# Altium PCB RaspberryPi4_shield.PcbDoc
Units mm, origin at the board's own origin, x right, y up, seen from the top; angles counter-clockwise.
Board outline 56 x 65 mm, 2 copper layers (Top Layer, Bottom Layer), stack 1.57 mm thick; 19 components, 11 nets, 51 pads, 17 vias.
Unrouted connection lines stored in the file: 11.
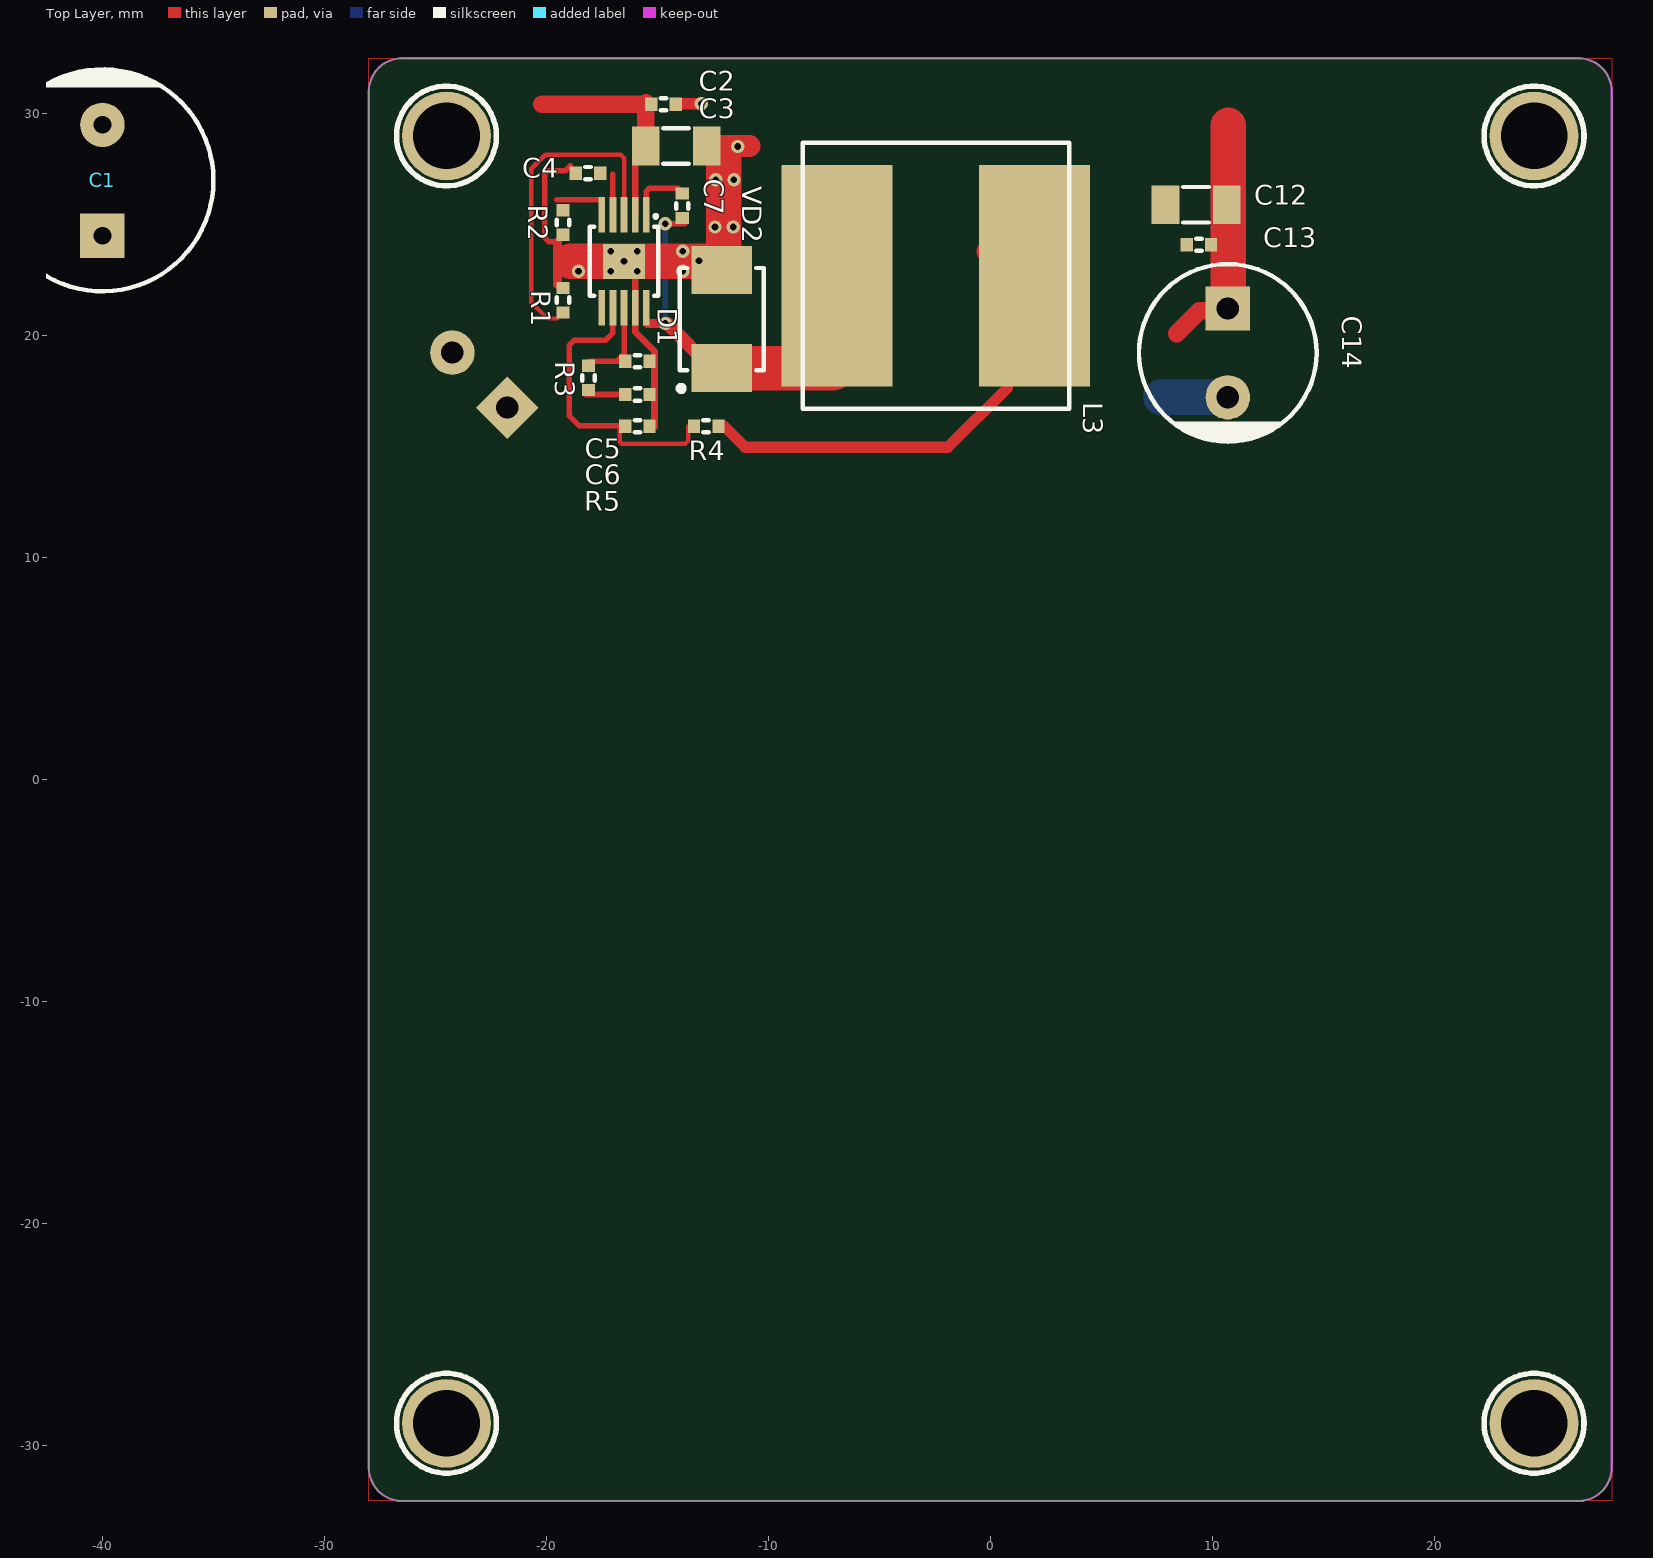
[diagram p0: Top Layer view]
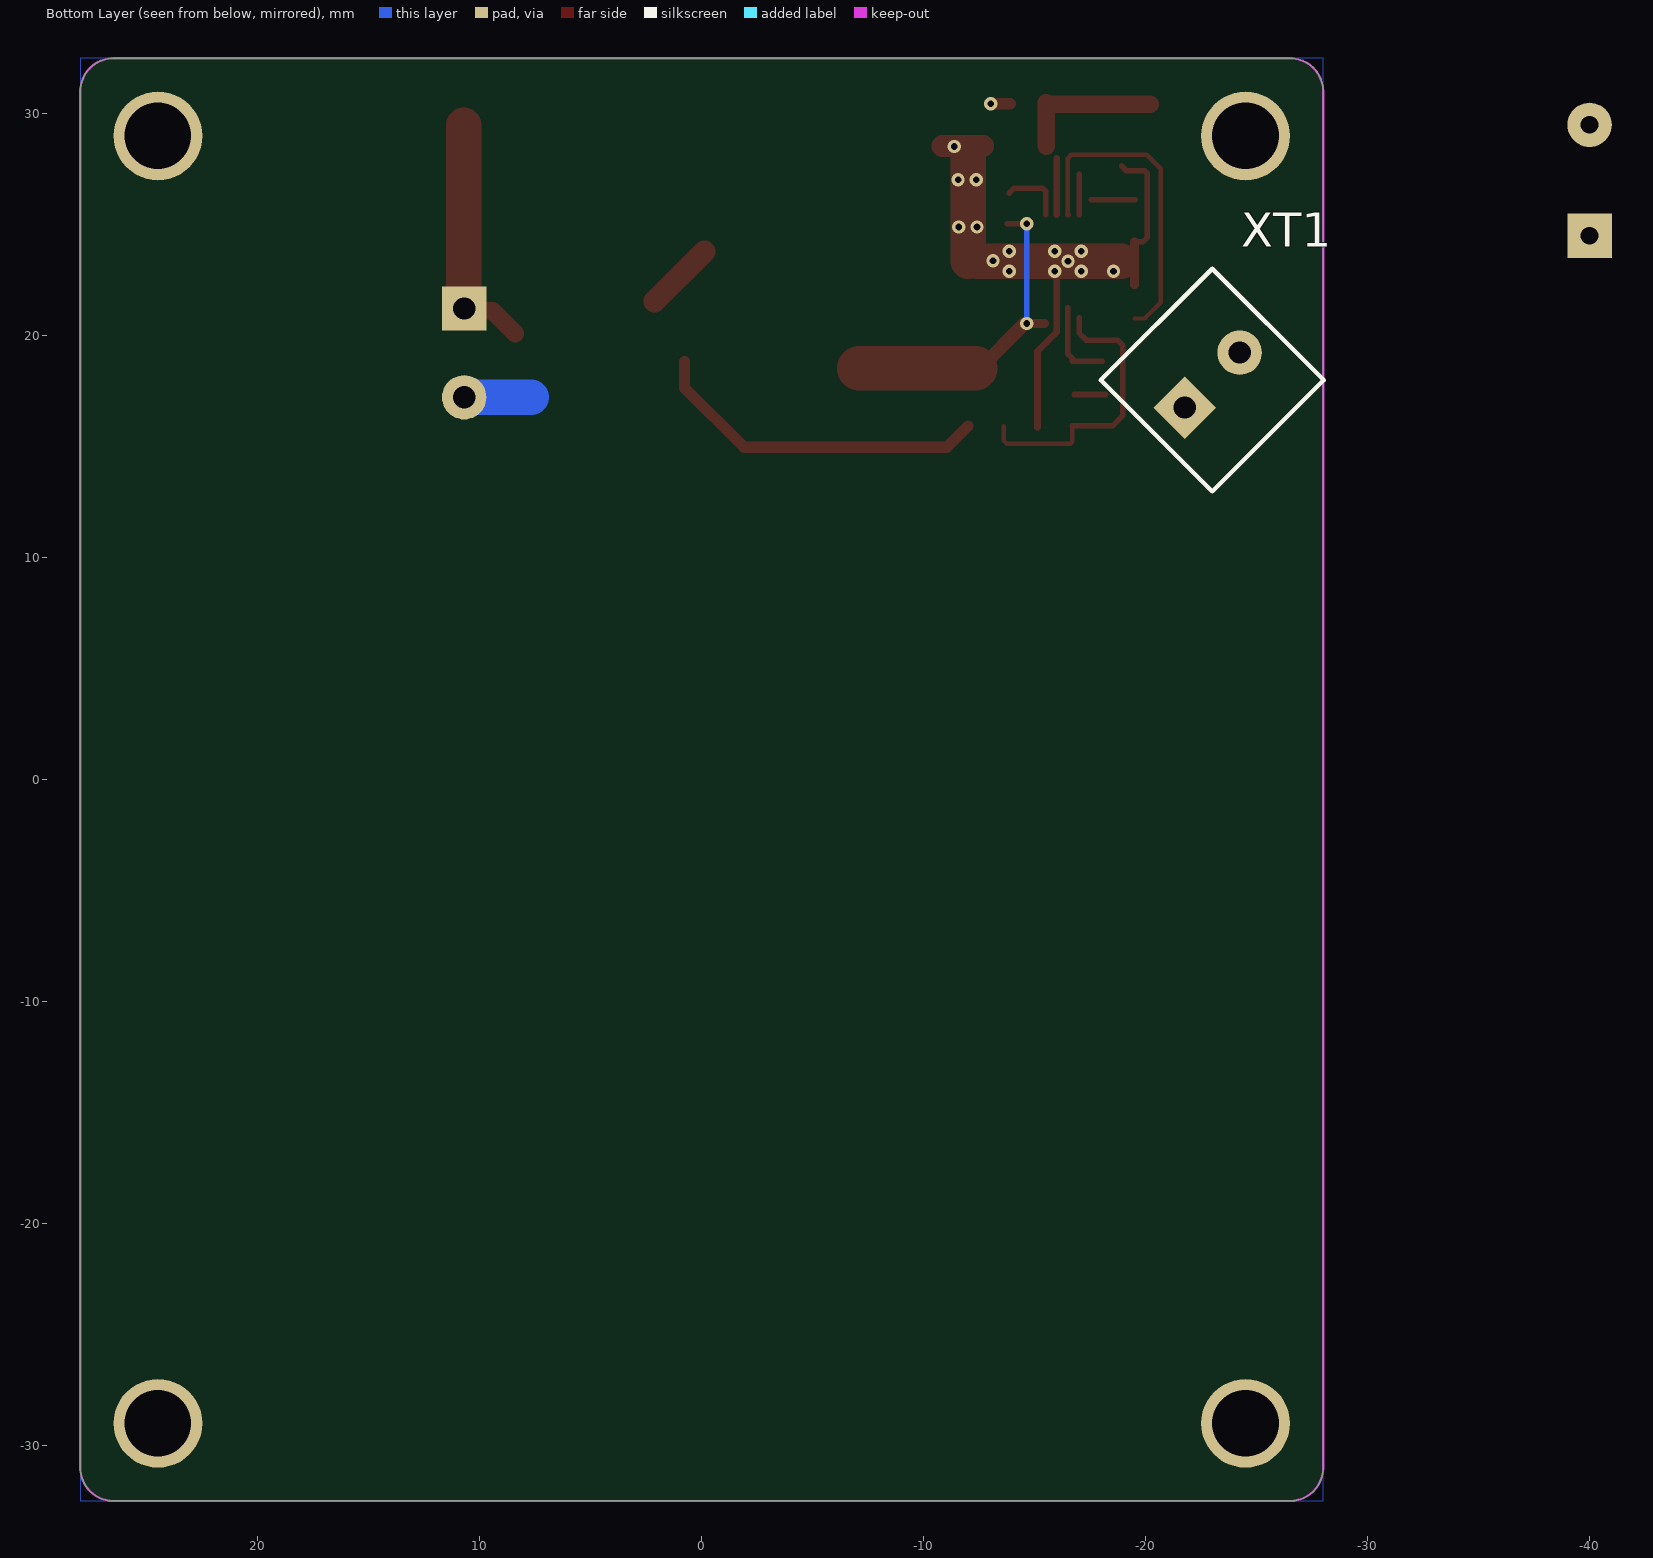
[diagram p1: Bottom Layer view, seen from below]
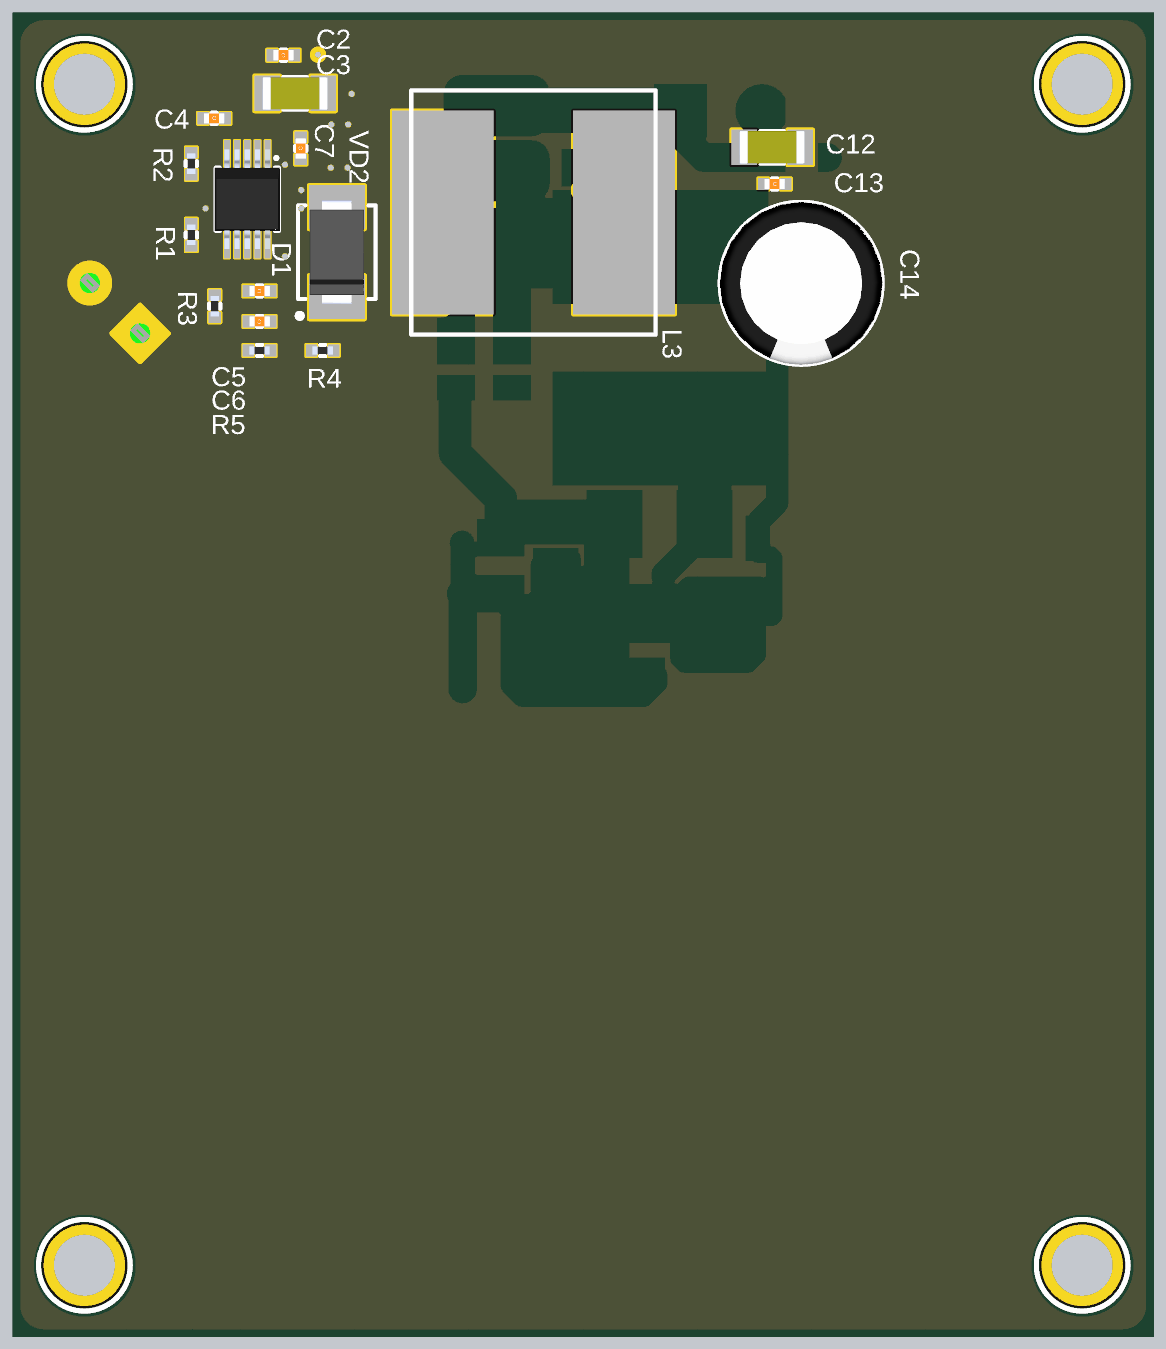
[diagram p2: 3D render of the assembled board from above, using the file's embedded part models]

## Layer stack, top to bottom
Top Solder: solder mask 0.0102, Solder Resist, Dk 3.5
Top Layer: signal copper 0.035
Dielectric1: core 1.5, FR-4, Dk 4.8
Bottom Layer: signal copper 0.035
Bottom Solder: solder mask 0.0102, Solder Resist, Dk 3.5

## Board outline
-28,-31.003 -28,31.003 -28,31 cw(c-26.5,31) -26.5,32.5 26.5,32.5 cw(c26.5,31) 28,31 28,31.003 28,-31.003 28,-31 cw(c26.5,-31) 26.5,-32.5 -26.5,-32.5 cw(c-26.5,-31)

## Design rules (kind name [scope] priority, off if disabled: settings)
Clearance Clearance_Poly [InPolygon] p1: gap=0.3 ignorepadtopadclearanceinfootprint=FALSE except(0: Arc-Hole Track-Hole SMDPad-Hole THPad-Hole Via-Hole Fill-Hole Poly-Hole Region-Hole Text-Hole)
Clearance [All] p2: gap=0.2 ignorepadtopadclearanceinfootprint=FALSE except(0: Arc-Hole Track-Hole SMDPad-Hole THPad-Hole Via-Hole Fill-Hole Poly-Hole Region-Hole Text-Hole)
ComponentClearance [All] p1: gap=0 collisioncheckmode=3 verticalgap=0 showdistances=FALSE
DiffPairsRouting [All] p1: maxlimit=0.25 minlimit=0.25 mostfreqgap=0.25 toplayer_minwidth=0.381 toplayer_maxwidth=0.381 toplayer_prefwidth=0.381 bottomlayer_minwidth=0.381 bottomlayer_maxwidth=0.381 bottomlayer_prefwidth=0.381 maxuncoupledlength=12
Height [All] p1: minheight=0 maxheight=50 prefheight=12
HoleSize [All] p1: absolutevalues=TRUE maxlimit=4 minlimit=0.2 maxpercent=80.000 minpercent=20.000
HoleToHoleClearance [All] p1: gap=0.1 allowstackedmicrovias=TRUE
MinimumSolderMaskSliver [All] p1: minsoldermaskwidth=0.1
PlaneClearance [All] p1: clearance=0.5
PlaneConnect [All] p1: planeconnectstyle=Relief reliefexpansion=0.5 reliefentries=4 reliefconductorwidth=0.3 reliefairgap=0.25
PolygonConnect "PolygonConnect_pad GND" [InNet('GND') vs (InPadClass('Class pad GND'))] p1: connectstyle=Direct reliefconductorwidth=0.25 reliefentries=4 polygonreliefangle="90 Angle" airgapwidth=0.25
PolygonConnect PolygonConnect_LineGND [InNet('GND') vs InNamedPolygon('GND')] p2: connectstyle=Direct reliefconductorwidth=0.254 reliefentries=4 polygonreliefangle="90 Angle" airgapwidth=0.254
PolygonConnect PolygonConnect_Via [IsVia] p3: connectstyle=Direct reliefconductorwidth=0.254 reliefentries=4 polygonreliefangle="90 Angle" airgapwidth=0.254
PolygonConnect [All] p4: connectstyle=Relief reliefconductorwidth=0.3 reliefentries=4 polygonreliefangle="90 Angle" airgapwidth=0.25
RoutingCorners [All] p1: cornerstyle=45-Degree minsetback=2.5 maxsetback=2.5
RoutingTopology [All] p1: topology=Daisy_MidDriven
RoutingVias [All] p1: holewidth=0.4 width=0.8 viastyle="Through Hole" minholewidth=0.3 minwidth=0.6 maxholewidth=1 maxwidth=1.5
SilkToSilkClearance [All] p1: silktosilkclearance=0.1
SilkToSolderMaskClearance SilkscreenOverComponentPads [IsPad] p1: minsilkscreentomaskgap=0.2 clearancetoexposedcopper=TRUE
SolderMaskExpansion [All] p1: expansion=0.102
Width [All] p1: maxlimit=3 minlimit=0.2 preferedwidth=0.25
18 further rules are at their usual default settings.

## Classes and differential pairs
pad class "Class pad GND": DA3-9

## Components (designator, comment, footprint, x,y, rotation, side; value= is the part's Value field where it differs from the comment)
C1 "680uF x 35V" CAP_P_DIP-10x20 -40,27 r270 top
C2 "=Name" CAPSMD-0402 -14.725,30.425 r180 top value="100nF x 50V"
C3 "CL31B106KBHNNNE" CAPSMD-1206 -14.15,28.55 r180 top value=10uF
C4 "=Name" CAPSMD-0402 -18.125,27.325 r0 top value=10nF
C5 "=Name" CAPSMD-0402 -15.9,18.85 r180 top value=47pF
C6 "=Name" CAPSMD-0402 -15.9,17.35 r180 top value=1nF
C7 "=Name" CAPSMD-0402 -13.875,25.85 r90 top value="100nF x 50V"
C12 "=Name" CAPSMD-1206 9.275,25.9 r0 top value="10uF x 50V"
C13 "=Name" CAPSMD-0402 9.4,24.1 r0 top value="10nF x 50V"
C14 "=Name" CAP_P_DIP-8x12 10.7,19.225 r90 top value="220uF x 35V"
D1 "TPS54160" MSOP10 -16.5,23.35 r270 top
L3 "INDUCTOR" L_Ind_smd_MSS1260 -2.45,22.7 r0 top value=150uH
R1 "=Name" RESSMD-0402 -19.25,21.6 r270 top value=10k
R2 "=Name" RESSMD-0402 -19.25,25.1 r90 top value=220k
R3 "=Name" RESSMD-0402 -18.1,18.1 r270 top value=200k
R4 "=Name" RESSMD-0402 -12.8,15.925 r0 top value=100k
R5 "=Name" RESSMD-0402 -15.9,15.925 r180 top value=4.7k
VD2 "B2100" "SMB (CASE-403C-01)" -12.1,20.75 r90 top
XT1 "DG350-3.5-02P-14" DG350-3.5-02P-14 -23,18 r135 bottom

## Footprints (in the part's own frame and the unit in brackets; to place one, negate y for a bottom-side part, rotate by r counter-clockwise, add the part's x,y. Pads: shape width x height; smd on the part's side, far side on the other; paste and mask are expansions set on the pad)
CAP_P_DIP-8x12 [mm] "Polar Capacitor, 2-Leads, Body 8x12mm"
  rect 2x2 hole 1: 1(2,0)
  round 2 hole 1: 2(-2,0)
  silkscreen extent -4,-4 4,4, body extent -3.98,-4 4,4, height 12.01
CAP_P_DIP-10x20 [mm] "Polar Capacitor, 2-Leads, Body 10x20mm"
  rect 2x2 hole 0.8: 1(2.5,0)
  round 2 hole 0.8: 2(-2.5,0)
  silkscreen extent -5.07,-5 5,5, body extent -4.97,-5 5,5, height 20.01
CAPSMD-0402 [mm] "Chip Capacitor, 2-Leads, Body 1,0x0,5mm"
  rect 0.55x0.6 smd mask+0.07: 1(-0.55,0) 2(0.55,0)
  silkscreen extent -0.13,-0.28 0.13,0.28, body extent -0.51,-0.25 0.49,0.25, height 0.49
CAPSMD-1206 [mm] "Chip Capacitor, 2-Leads, Body 3,2x1,6mm"
  rect 1.25x1.75 smd: 1(-1.375,0) 2(1.375,0)
  silkscreen extent -0.58,-0.8 0.58,0.8, body extent -1.6,-0.81 1.6,0.81, height 1.21
DG350-3.5-02P-14 [mm]
  rect 2x2 hole 1: 1(-1.75,0)
  round 2 hole 1: 2(1.75,0)
  silkscreen extent -3.55,-3.55 3.55,3.55, body extent -3.56,-3.44 3.56,3.85, height 8.51
L_Ind_smd_MSS1260 [mm] "Inductor 2-Leads, 7x7mm"
  rect 5x10 smd: 1(-4.45,0) 2(4.45,0)
  silkscreen extent -6,-6 6,6, body extent -6,-6 6,6, height 6.1
MSOP10 [mm] "S-PDSO-G10"
  rect 1.6x0.3 smd mask+0.05: 1(-2.1,1) 2(-2.1,0.5) 3(-2.1,0) 4(-2.1,-0.5) 5(-2.1,-1) 6(2.1,-1) 7(2.1,-0.5) 8(2.1,0) 9(2.1,0.5) 10(2.1,1)
  rect 1.57x1.88 smd: 11(0,0)
  silkscreen extent -2.05,-1.55 1.55,1.55, body extent -2.45,-1.6 2.45,1.6, height 1.3
RESSMD-0402 [mm]
  rect 0.55x0.6 smd mask+0.07: 1(-0.55,0) 2(0.55,0)
  silkscreen extent -0.13,-0.28 0.13,0.28, body extent -0.5,-0.2 0.5,0.2, height 0.25
"SMB (CASE-403C-01)" [mm] "Molded Diode, 2-Leads, Body 4,3x2,7mm, IPC Medium Density"
  rect 2.16x2.74 smd: 1(2.21,0) 2(-2.21,0)
  silkscreen extent -3.25,-1.9 2.3,1.95, body extent -2.55,-1.33 2.55,1.33, height 2.13

## Part data
C1: library part CAPPOL_Dip, "Capasitor polar Dip"
C2 C3 C4: library part CAPNPOL, "Capasitor not polar", Power/Voltage=50V, Tolerance=X7R
  C3: Name=CL31B106KBHNNNE
C5 C6 C7 C12: library part CAPNPOL, "Capasitor not polar", Power/Voltage=10V, Tolerance=X7R
C13: library part CAPNPOL, "Capasitor not polar smd", Power/Voltage=10V, Tolerance=X7R
C14: library part CAPPOL, "Capasitor polar"
D1: library part TPS54260, "DC/DC Contoller", ManufacturerPArtNumber=TPS54160DGQ, Name=TPS54160
L3: "Inductor in SMD package", Name=INDUCTOR
R1 R2 R3 R4 R5: library part RES0125, "Resistor", Tolerance=10%
VD2: library part "Diode Shotki", "SMD Diode Shotki", Name=B2100

## Free pads (board coordinates)
  round 4 hole 3: 0(-24.5,-29) 0(-24.5,29) 0(24.5,-29) 0(24.5,29)

## Via types
v1: diameter 0.6, hole 0.3, Top Layer to Bottom Layer, tented both sides, 11 vias
v2: diameter 0.6, hole 0.3, Top Layer to Bottom Layer, 6 vias

## Nets (pads, with @x,y where several pads share a name; then routed paths per layer and width w, separated by ;. In a path a pad name is that pad's centre, name@x,y a point inside that pad or via, vN(x,y) a via of type N, cw(c..) or ccw(c..) an arc to the next point about the centre after c; other vN are vias at no path point)
5.1V: C12.2 C13.2 C14.1 L3.2 R4.2 | length 28.7
  Top Layer w0.5: R4.2@-12,15.925 -11.05,14.975 -1.9,14.975 0.775,17.65 L3.2@0.775,18.825
  Top Layer w0.8: 8.4,20.1 9.425,21.125 C14.1@10.725,21.125
  Top Layer w1: L3.2@-0.125,23.8 L3.2@2.125,21.55
  Top Layer w1.6: C14.1@10.725,22.125 10.725,29.475
+24V: C1.1 C2.2 C3.2 D1.2 XT1.2 | length 9.2
  Top Layer w0.3: D1.2 C3.2@-16,28
  Top Layer w0.8: -20.2,30.425 C2.2@-15.525,30.425 ; C3.2 C2.2@-15.525,30.5
GND: C1.2 C2.1 C3.1 C4.1 C5.1 C6.1 C12.1 C13.1 C14.2 D1.9 D1.11 R1.1 R2.1 R5.1 VD2.1 XT1.1 | length 31.2
  Top Layer w0.25: -19.5,24.225 -19.875,24.225 -20.075,24.425 -20.075,27.3 -19.95,27.425 -19.15,27.425 -18.925,27.65
  Top Layer w0.3: D1.11@-16,22.9 -16,20.175 -15.125,19.3 R5.1@-15.125,15.875
  Top Layer w0.4: R1.1@-19.5,22.3 -19.5,24.225
  Top Layer w0.5: -13.9,30.45 v2(-13.025,30.45)
  Top Layer w1: C1.2@-40.125,29.55 C1.2@-40.051,29.591 ; C3.1@-12.675,28.55 -10.85,28.55
  Top Layer w1.6: -18.9,23.35 v2(-16.5,23.35) -13.85,23.35 VD2.1@-12.425,23.35 ; VD2.1@-12,23.35 -12,28.125
  Bottom Layer w1.6: 7.675,17.225 C14.2 C14.2@10.725,17.225
  other v1: -18.55,22.9 -13.85,22.9 -13.125,23.375 -13.85,23.8 -12.4,24.9 -11.575,24.9 -12.375,27.025 -11.55,27.025 -11.375,28.525
  other v2: -17.1,22.9 -15.9,22.9 -17.1,23.8 -15.9,23.8
NetC4_2: C4.2 D1.4 | length 1.8
  Top Layer w0.25: D1.4 -17,27.275
NetC5_2: C5.2 D1.8 R3.1 | length 3.9
  Top Layer w0.25: R3.1@-18.05,18.85 -16.825,18.85 ; C5.2@-16.7,18.85 -16.825,18.85 ; D1.8 -16.5,19.175 -16.825,18.85
NetC6_2: C6.2 R3.2 | length 1.4
  Top Layer w0.25: R3.2@-18.2,17.35 -16.775,17.35
NetC7_1: C7.1 D1.10 L3.1 VD2.2 | length 14.4
  Top Layer w0.25: v1@-14.56,20.575 v1@-14.485,20.575 ; v1@-14.55,25.05 C7.1@-13.775,25.05
  Top Layer w0.4: D1.10@-15.45,20.55 v1(-14.65,20.55) v1@-14.585,20.55
  Top Layer w0.6: v1@-14.56,20.55 VD2.2@-12.475,18.465
  Top Layer w2: VD2.2@-12.335,18.525 L3.1@-7.1,18.525
  Bottom Layer w0.25: v1(-14.65,20.55) -14.65,25.048 v1(-14.65,25.05)
NetC7_2: C7.2 D1.1 | length 2.9
  Top Layer w0.25: D1.1 -15.5,26.5 -15.35,26.65 -14.075,26.65 C7.2@-13.85,26.425
NetD1_3: D1.3 R1.2 | length 14.6
  Top Layer w0.2: -19.5,20.775 -19.95,20.775 -20.675,21.5 -20.675,27.525 -20.05,28.15 -16.65,28.15 -16.5,28 D1.3
  Top Layer w0.25: D1.3@-16.51,25.45 D1.3
NetD1_5: D1.5 R2.2 | length 2
  Top Layer w0.25: -19.525,26.125 D1.5@-17.55,26.125
NetD1_7: D1.7 R4.1 R5.2 | length 13.1
  Top Layer w0.2: R5.2@-16.7,15.925 -16.7,15.225 -16.6,15.125 -13.75,15.125 -13.6,15.275 R4.1@-13.6,15.925
  Top Layer w0.25: D1.7@-17,20.8 -17,20.125 -17.325,19.8 -18.725,19.8 -18.975,19.55 -18.975,16.4 -18.525,15.95 R5.2@-16.7,15.95
pads on no net: D1.6

## Polygon pours and split planes (outlines as drawn)
no net on Bottom Layer "GND_L02_P014" (solid, shelved, pour order 14): -28,32.5 28,32.5 28,-32.5 -28,-32.5
no net on Top Layer "GND_L01_P012" (solid, shelved, pour order 12): -28,32.5 28,32.5 28,-32.5 -28,-32.5

## Keep-outs
Keep-Out Layer:
  lines w0.1: -26.5,-32.5 cw(c-26.5,-31) -28,-31 ccw(c-26.5,-31) -26.5,-32.5 ; -26.5,-32.5 26.5,-32.5 ; -26.5,-32.5 26.5,-32.5 ; -26.5,32.5 ccw(c-26.5,31) -28,31 cw(c-26.5,31) -26.5,32.5 ; -26.5,32.5 26.5,32.5 ; -26.5,32.5 26.5,32.5 ; 26.5,-32.5 ccw(c26.5,-31) 28,-31 cw(c26.5,-31) 26.5,-32.5 ; 26.5,32.5 cw(c26.5,31) 28,31 ccw(c26.5,31) 26.5,32.5 ; -28,-31.003 -28,31.003 -28,-31.003 ; 28,-31.003 28,31.003 28,-31.003

## Other copper
Top Layer:
  pour cut-out: 22.022,28.98 ccw(c24.522,28.98) 24.522,26.48 ccw(c24.522,28.98) 27.022,28.98 ccw(c24.522,28.98) 24.522,31.48 ccw(c24.522,28.98)
  pour cut-out: 22.022,-29.02 ccw(c24.522,-29.02) 24.522,-31.52 ccw(c24.522,-29.02) 27.022,-29.02 ccw(c24.522,-29.02) 24.522,-26.52 ccw(c24.522,-29.02)
  pour cut-out: -26.978,-29.02 ccw(c-24.478,-29.02) -24.478,-31.52 ccw(c-24.478,-29.02) -21.978,-29.02 ccw(c-24.478,-29.02) -24.478,-26.52 ccw(c-24.478,-29.02)
  pour cut-out: -26.978,28.98 ccw(c-24.478,28.98) -24.478,26.48 ccw(c-24.478,28.98) -21.978,28.98 ccw(c-24.478,28.98) -24.478,31.48 ccw(c-24.478,28.98)
Bottom Layer:
  pour cut-out: 22.022,28.98 ccw(c24.522,28.98) 24.522,26.48 ccw(c24.522,28.98) 27.022,28.98 ccw(c24.522,28.98) 24.522,31.48 ccw(c24.522,28.98)
  pour cut-out: 22.022,-29.02 ccw(c24.522,-29.02) 24.522,-31.52 ccw(c24.522,-29.02) 27.022,-29.02 ccw(c24.522,-29.02) 24.522,-26.52 ccw(c24.522,-29.02)
  pour cut-out: -26.978,-29.02 ccw(c-24.478,-29.02) -24.478,-31.52 ccw(c-24.478,-29.02) -21.978,-29.02 ccw(c-24.478,-29.02) -24.478,-26.52 ccw(c-24.478,-29.02)
  pour cut-out: -26.978,28.98 ccw(c-24.478,28.98) -24.478,26.48 ccw(c-24.478,28.98) -21.978,28.98 ccw(c-24.478,28.98) -24.478,31.48 ccw(c-24.478,28.98)

## Silkscreen, mask and mechanical layers (free items; w line width, h text height)
Top Overlay:
  circle w0.25: c24.5,29 r2.25
  circle w0.25: c24.5,-29 r2.25
  circle w0.25: c-24.5,-29 r2.25
  circle w0.25: c-24.5,29 r2.25
Drill Drawing:
  lines w0.1: 26.5,-32.5 ccw(c26.5,-31) 28,-31